# Altium PCB OpenVLC_1.3.1.PcbDoc
Units mm, origin at the board's own origin, x right, y up, seen from the top; angles counter-clockwise.
Board outline 40.12 x 54.61 mm, 2 copper layers (Top Layer, Bottom Layer); 43 components, 27 nets, 165 pads, 20 vias.
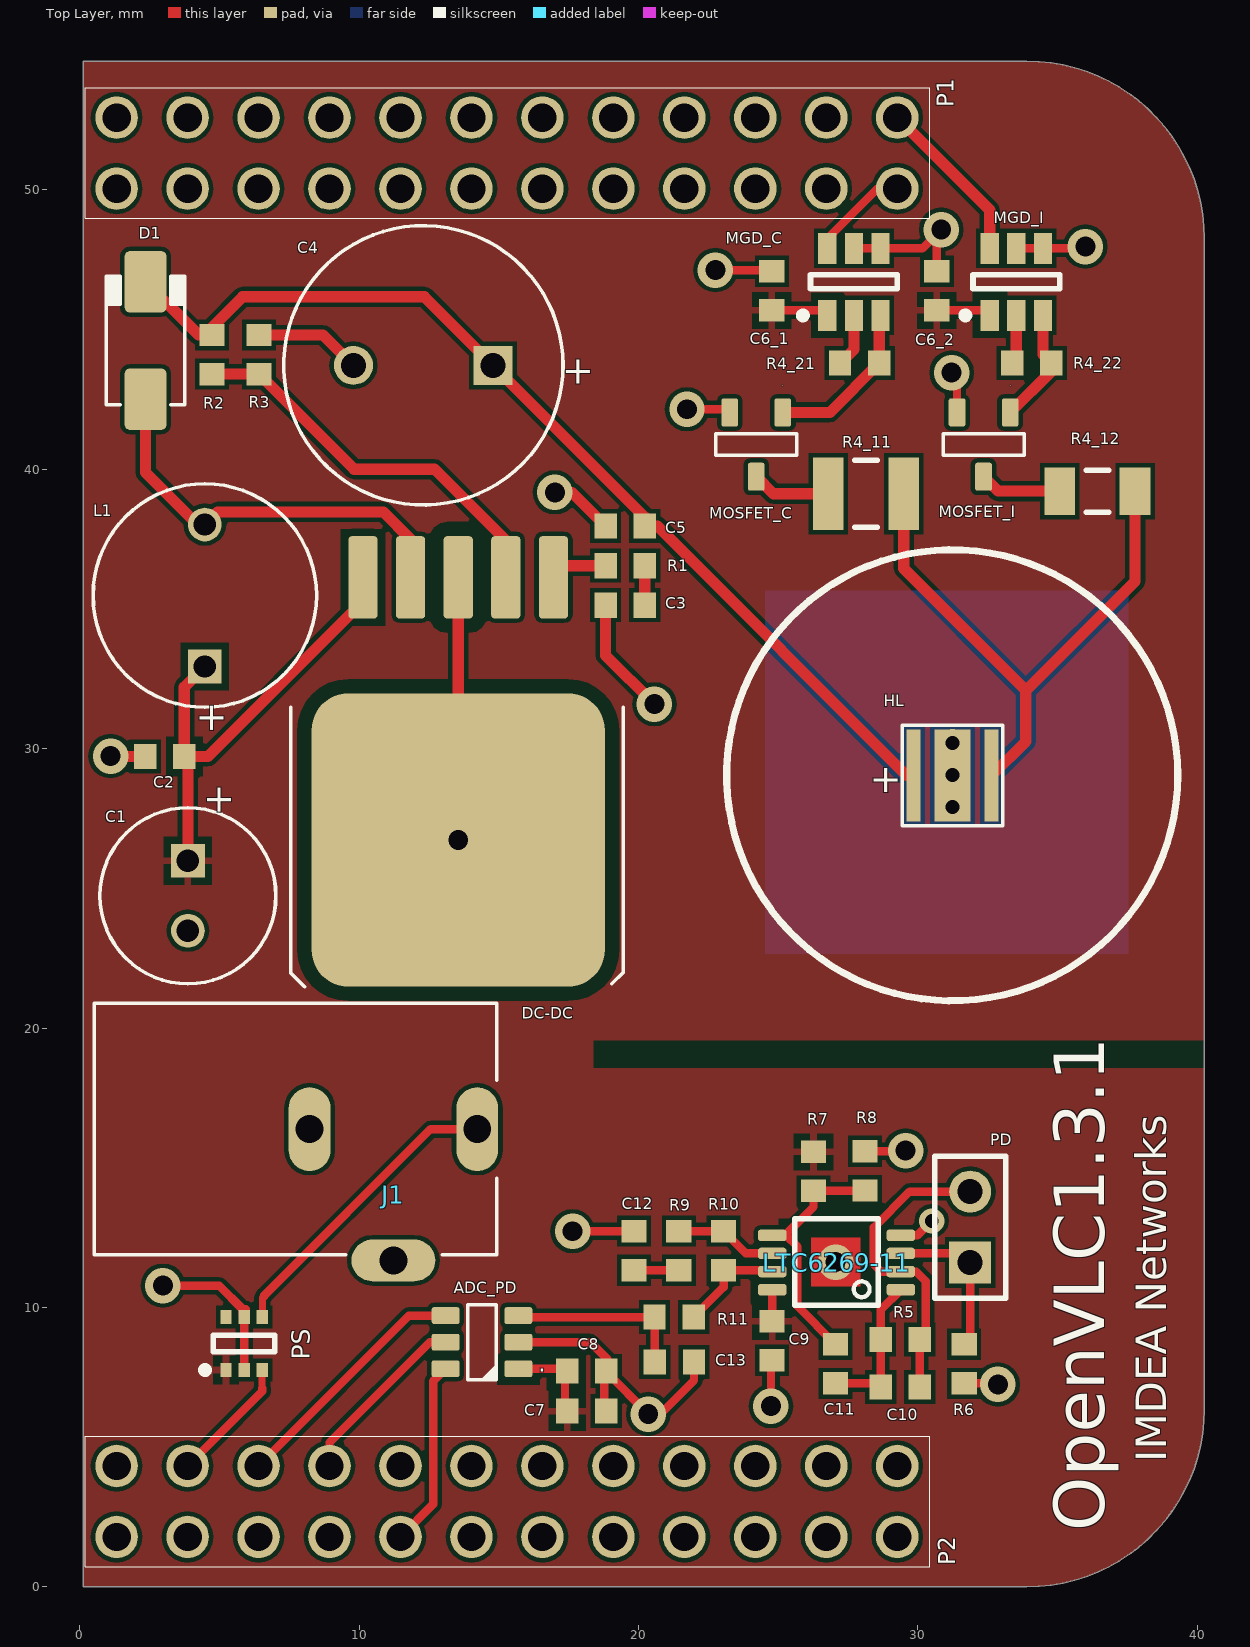
[diagram p0: Top Layer view]
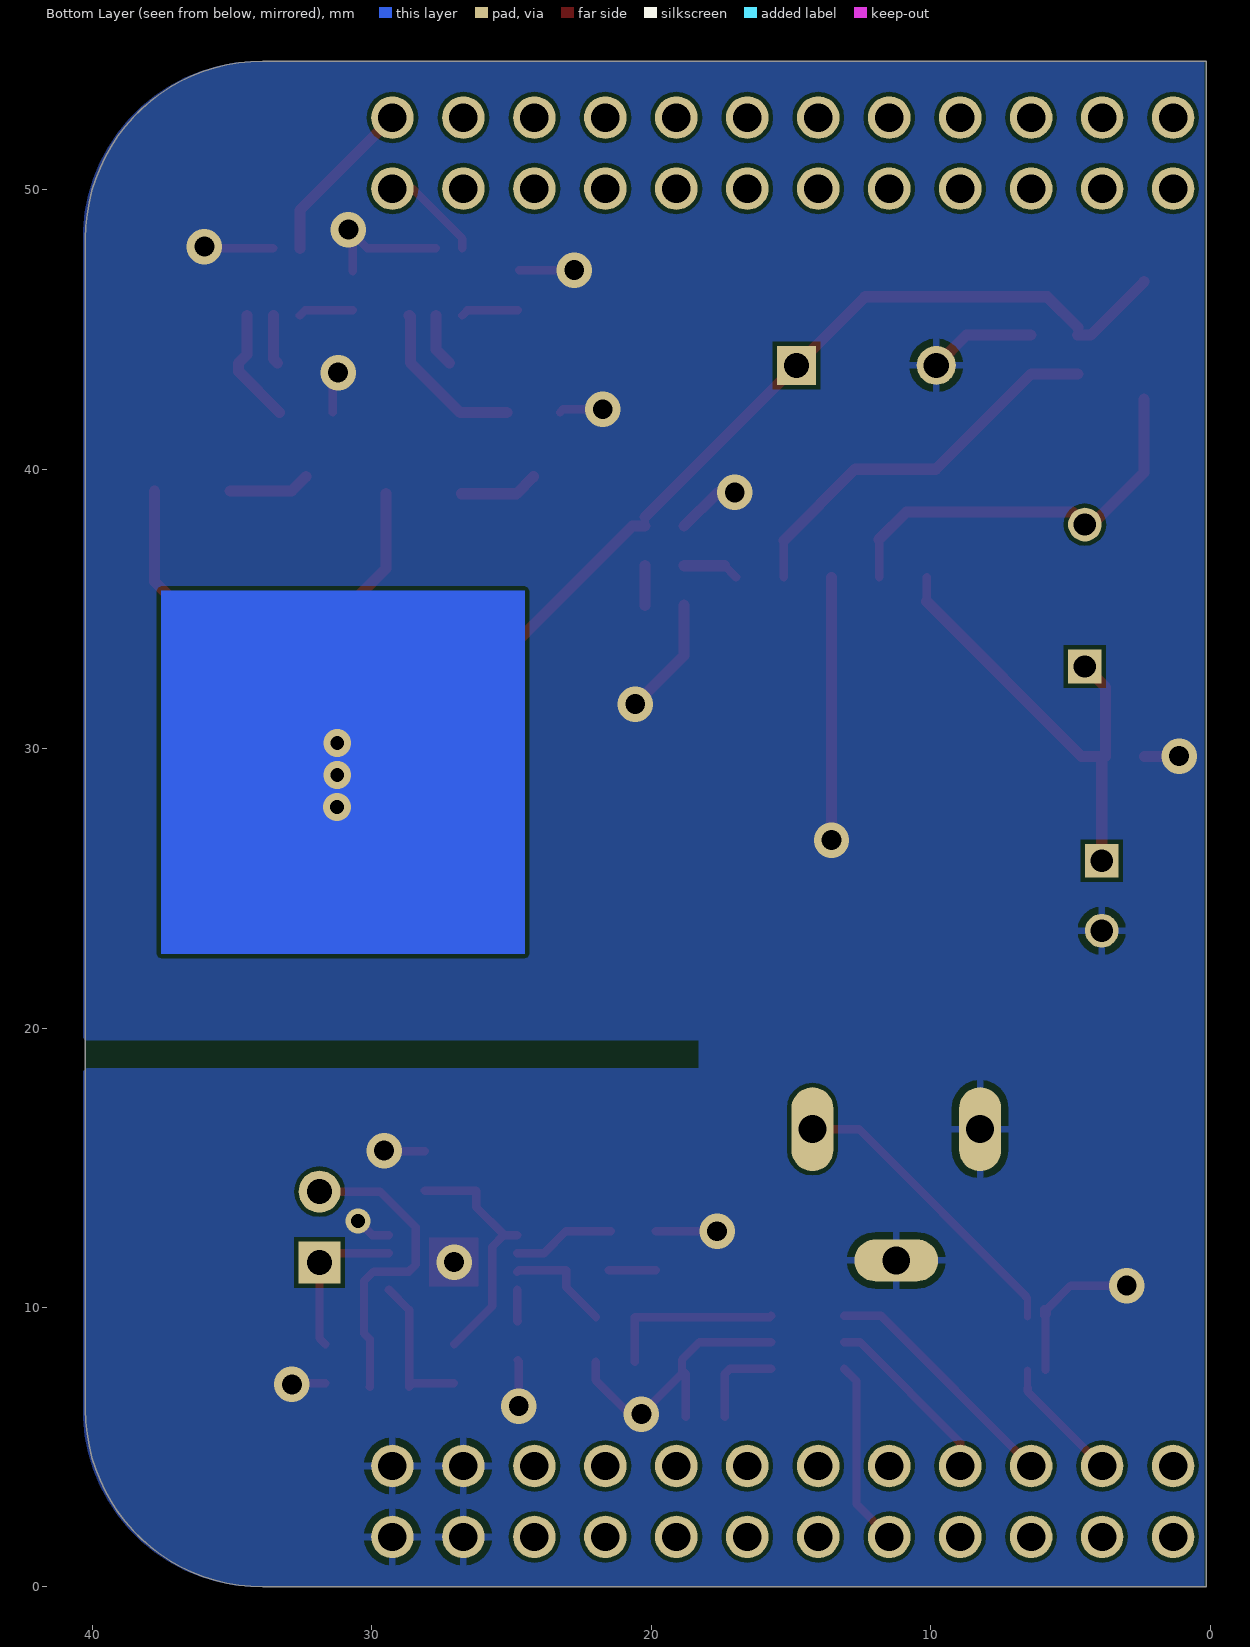
[diagram p1: Bottom Layer view, seen from below]

## Layer stack, top to bottom
Top Solder: solder mask 0.0102, Solder Resist, Dk 3.5
Top Layer: signal copper 0.0356
Dielectric1: dielectric 0.32, FR-4, Dk 4.8
Bottom Layer: signal copper 0.0356
Bottom Solder: solder mask 0.0102, Solder Resist, Dk 3.5

## Board outline
0.134,0 0.134,54.61 33.904,54.61 cw(c33.904,48.261) 40.254,48.26 40.254,6.35 cw(c33.904,6.35) 33.904,0

## Design rules (kind name [scope] priority, off if disabled: settings)
Clearance Clearance_1 [(InNet('GND') AND InComponent('DC-DC'))] p1: gap=0.5 ignorepadtopadclearanceinfootprint=FALSE except(0: Arc-Hole Track-Hole SMDPad-Hole THPad-Hole Via-Hole Fill-Hole Poly-Hole Region-Hole Text-Hole)
Clearance [All] p2: gap=0.15 ignorepadtopadclearanceinfootprint=FALSE except(0: Arc-Hole Track-Hole SMDPad-Hole THPad-Hole Via-Hole Fill-Hole Poly-Hole Region-Hole Text-Hole)
DiffPairsRouting [All] p1: maxlimit=0.3 minlimit=0.3 mostfreqgap=0.3 toplayer_minwidth=0.381 toplayer_maxwidth=0.381 toplayer_prefwidth=0.381 bottomlayer_minwidth=0.381 bottomlayer_maxwidth=0.381 bottomlayer_prefwidth=0.381 maxuncoupledlength=12.7
HoleSize [All] p1: absolutevalues=TRUE maxlimit=2.54 minlimit=0.25 maxpercent=80.000 minpercent=20.000
MinimumSolderMaskSliver [All] p1: minsoldermaskwidth=0.15
PolygonConnect PolygonConnect_1 [IsVia & InNet('GND')] p1: connectstyle=Direct reliefconductorwidth=0.254 reliefentries=4 polygonreliefangle="90 Angle" airgapwidth=0
PolygonConnect [All] p2: connectstyle=Relief reliefconductorwidth=0.254 reliefentries=4 polygonreliefangle="90 Angle" airgapwidth=0.254
RoutingVias [All] p1: holewidth=0.711 width=1.27 viastyle="Through Hole" minholewidth=25 minwidth=0.55 maxholewidth=0.711 maxwidth=1.27
SMDNeckDown [All] p1: percent=80.000
SilkToSilkClearance [All] p1: silktosilkclearance=0.15
SilkToSolderMaskClearance [IsPad] p1: minsilkscreentomaskgap=0.15 clearancetoexposedcopper=TRUE
SolderMaskExpansion [All] p1: expansion=0.102
Width [All] p1: maxlimit=0.5 minlimit=0.15 preferedwidth=0.3 minimp=50.000000 maximp=50.000000 favimp=50.000000
25 further rules are at their usual default settings.

## Classes and differential pairs
component class OpenVLC_1.3.7: ADC_PD C1 C2 C3 C4 C5 C7 C8 C10 C11 D1 DC-DC HL J1 L1 LTC6269-11 MOSFET_C P1 P2 PD R1 R2 R3 R5 R6 R7 R10 R11

## Components (designator, comment, footprint, x,y, rotation, side; value= is the part's Value field where it differs from the comment)
ADC_PD "ADC_PD" SOT23-6 14.401,8.76 r180 top
C1 "Cap" "WCAP-ATG8 6.3x11x2.5x0.5" 3.876,24.737 r270 top
C2 "Cap" 1608[0603] 3.048,29.724 r180 top
C3 "Cap" 1608[0603] 19.525,35.135 r180 top
C4 "Cap" "WCAP-ATG8 10x12.5x5x0.6" 12.3,43.721 r180 top
C5 "Cap" 1608[0603] 19.525,37.966 r180 top
C6_1 "Cap" 1608[0603] 24.772,46.387 r90 top
C6_2 "Cap" 1608[0603] 30.68,46.387 r90 top
C7 "Cap" 1608[0603] 18.152,6.294 r0 top
C8 "Cap" 1608[0603] 18.152,7.725 r0 top
C9 "Cap" 1608[0603] 24.786,8.809 r90 top
C10 "Cap" 1608[0603] 29.372,7.157 r180 top
C11 "Cap" 1608[0603] 27.06,7.983 r90 top
C12 "Cap" 1608[0603] 19.84,12.034 r270 top
C13 "Cap" 1608[0603] 21.288,8.056 r0 top
D1 "" DO-214AC 2.361,44.61 r90 top
DC-DC "LM2585" TO-263-5 13.55,29.982 r270 top
HL "High Power LED" LEDM345X345X226 31.239,29.04 r0 top
J1 "2.0 mm Center Pin, 2.5 A, Right Angle, Through Hole, Tapered Pins, Dc Power Jack Connector" CUI_PJ-102A 11.232,16.384 r90 top
L1 "Inductor" "WCAP-ATG8 8x16x5x0.5" 4.481,35.483 r90 top
LTC6269-11 "LTC6269-10" MSOP8 27.091,11.611 r180 top
MGD_C "LM5114B" SOT23-6_N 27.71,46.707 r90 top
MGD_I "LM5114B" SOT23-6_N 33.525,46.707 r90 top
MOSFET_C "MOSFET" SOT23-3 24.218,40.885 r270 top
MOSFET_I "MOSFET" SOT23-3 32.354,40.885 r270 top
P1 "BBB_P8_reduced" BBB_CAPE_NO_HEADER_R_24 -26.616,50.048 r180 top
P2 "BBB_P9_reduced" BBB_CAPE_NO_HEADER_R_24 -26.616,1.788 r180 top
PD "Photo Sen" HDR1X2 31.873,11.609 r90 top
PS "Comment" ONSC-SOT-363-6-419B-02_W_V 5.889,8.713 r90 top
R1 "Res Semi" 1608[0603] 19.525,36.551 r180 top
R2 "Res1" 1608[0603] 4.734,44.107 r90 top
R3 "Res1" 1608[0603] 6.415,44.107 r270 top
R4_11 "Res3" 14-1210 28.146,39.124 r180 top
R4_12 "Res3" C1206 36.427,39.219 r180 top
R4_21 "Res1" 1608[0603] 27.917,43.802 r180 top
R4_22 "Res1" 1608[0603] 34.077,43.802 r180 top
R5 "Res1" 1608[0603] 29.368,8.86 r180 top
R6 "Res1" 1608[0603] 31.66,7.983 r90 top
R7 "Res1" 1608[0603] 26.267,14.873 r90 top
R8 "Res1" 1608[0603] 28.106,14.889 r270 top
R9 "Res1" 1608[0603] 21.444,12.034 r270 top
R10 "Res1" 1608[0603] 23.049,12.034 r90 top
R11 "Res1" 1608[0603] 21.278,9.658 r0 top

## Footprints (in the part's own frame and the unit in brackets; to place one, negate y for a bottom-side part, rotate by r counter-clockwise, add the part's x,y. Pads: shape width x height; smd on the part's side, far side on the other; paste and mask are expansions set on the pad)
14-1210 [mm] "Chip Resistor, Body 3.2x2.5mm, IPC High Density"
  rect 1.1x2.6 smd: 1(-1.35,0) 2(1.35,0)
  silkscreen extent -0.4,-1.2 0.4,1.2, body extent -1.68,-1.32 1.68,1.32, height 0.9
1608[0603] [mm] "Chip Capacitor, Body 1.6x0.8mm, IPC High Density"
  rect 0.8x0.9 smd: 1(-0.7,0) 2(0.7,0)
  body extent -0.87,-0.48 0.87,0.48, height 1.3
BBB_CAPE_NO_HEADER_R_24 [mil] "46-pin male header for BeagleBone Black P8,P9"
  round 60 hole 40: 23(-1100,0) 24(-1100,-100) 25(-1200,0) 26(-1200,-100) 27(-1300,0) 28(-1300,-100) 29(-1400,0) 30(-1400,-100) 31(-1500,0) 32(-1500,-100) 33(-1600,0) 34(-1600,-100) 35(-1700,0) 36(-1700,-100) 37(-1800,0) 38(-1800,-100) 39(-1900,0) 40(-1900,-100) 41(-2000,0) 42(-2000,-100) 43(-2100,0) 44(-2100,-100) 45(-2200,0) 46(-2200,-100)
  silkscreen extent -2246,-142 -1056,42
C1206 [mm] "Chip Capacitor, Body 3.2x1.6mm, IPC High Density"
  rect 1.1x1.7 smd: 1(-1.35,0) 2(1.35,0)
  silkscreen extent -0.4,-0.75 0.4,0.75, body extent -1.7,-0.9 1.7,0.9, height 1.3
CUI_PJ-102A [mm]
  oval 3x1.5 hole 1: 1(0,-3) 2(0,3)
  oval 1.5x3 hole 1: 3(-4.7,0)
  silkscreen extent -4.5,-3.7 4.5,10.7
DO-214AC [mm] "JEDEC DO214 variation AC. SMA"
  round 0.508 on Mech15: 0(0,0)
  rrect25% 2.2x1.5 smd: A(-2.1,0) K(2.1,0)
  silkscreen extent -2.3,-1.4 2.3,1.4, body extent -2.6,-1.3 2.6,1.3, height 2.42
HDR1X2 [mm] "Connector; Header; 2 Position"
  rect 1.5x1.5 hole 0.9: 1(0,0)
  round 1.5 hole 0.9: 2(2.54,0)
  silkscreen extent -1.27,-1.27 3.81,1.27
LEDM345X345X226 [mm]
  rect 0.5x3.3 smd: 1(-1.4,0) 2(1.4,0)
  rect 1.3x3.3 smd: 3(0,0)
  silkscreen extent -1.8,-1.8 1.8,1.8
MSOP8 [mm]
  rrect50% 1.02x0.41 smd: 1(-2.3,0.975) 2(-2.3,0.325) 3(-2.3,-0.325) 4(-2.3,-0.975) 5(2.3,-0.975) 6(2.3,-0.325) 7(2.3,0.325) 8(2.3,0.975)
  silkscreen extent -1.5,-1.56 1.5,1.53, body extent -2.46,-1.49 2.44,1.51, height 1.15
ONSC-SOT-363-6-419B-02_W_V [mm] "SOT23, 6-Leads, Body 2x1.25mm, Pitch 0.65mm"
  rect 0.5x0.4 smd: 1(-0.95,0.65) 2(-0.95,0) 3(-0.95,-0.65) 4(0.95,-0.65) 5(0.95,0) 6(0.95,0.65)
  silkscreen extent -1.07,-1.1 0.3,1.52, body extent -0.63,-1 0.63,1, height 1.1
SOT23-3 [mm] "SOT23, 3 pin"
  round 0.5 on Mech15: 0(0,0)
  rrect25% 1x0.6 smd: 1(-1.15,0.95) 2(-1.15,-0.95) 3(1.15,0)
  silkscreen extent -0.38,-1.45 0.38,1.45, body extent -1.4,-1.45 1.4,1.45, height 1.29
SOT23-6 [mm]
  round 0.5 on Mech15: 0(0,0)
  rrect25% 1x0.6 smd: 1(-1.3,0.95) 2(-1.3,0) 3(-1.3,-0.95) 4(1.3,-0.95) 5(1.3,0) 6(1.3,0.95)
  silkscreen extent -0.51,-1.35 0.51,1.35, body extent -1.4,-1.45 1.4,1.45, height 1.44
SOT23-6_N [mm] "SOT23, 6-Leads, Body 2.9x1.6mm, Pitch 0.95mm, Lead Span 2.7mm, IPC Medium Density"
  rect 1.1x0.65 smd: 1(-1.2,0.95) 2(-1.2,0) 3(-1.2,-0.95) 4(1.2,-0.95) 5(1.2,0) 6(1.2,0.95)
  silkscreen extent -1.32,-1.55 0.25,1.95, body extent -0.9,-1.55 0.9,1.55, height 1.45
TO-263-5 [mm] "D-PAK/TO-263-5; 5 Leads; Body 14.4 (inc. leads) x 10.4 mm (LxW max)"
  round 0.5 on Mech15: 0(0,0)
  rrect25% 2.95x1.05 smd: 1(-6.15,3.41) 2(-6.15,1.705) 3(-6.15,0) 4(-6.15,-1.705) 5(-6.15,-3.41)
  rrect25% 10.5x10.5 smd: 3(3.25,0)
  silkscreen extent -1.5,-6 8.5,5.9, body extent -6.73,-5.08 7.29,5.08, height 4.56
"WCAP-ATG8 6.3x11x2.5x0.5" [mm] "Polarized capacitors, Aluminum Electrolytic Capacitors, 2-Leads, Body 6.3x11x2.5x0.5"
  rect 1.206x1.206 hole 0.8: 1(-1.25,0)
  round 1.206 hole 0.8: 2(1.25,0)
  silkscreen extent -3.15,-3.15 3.15,3.15, body extent -3.12,-3.13 3.14,3.15, height 11.11
"WCAP-ATG8 8x16x5x0.5" [mm] "Polarized capacitors, Aluminum Electrolytic Capacitors, 2-Leads, Body 8x16x3.5x0.5"
  rect 1.206x1.206 hole 0.8: 1(-2.54,0)
  round 1.206 hole 0.8: 2(2.54,0)
  silkscreen extent -4,-4 4,4, body extent -3.97,-3.98 3.99,4, height 19.51
"WCAP-ATG8 10x12.5x5x0.6" [mm] "Polarized capacitors, Aluminum Electrolytic Capacitors, 2-Leads, Body 10x12.5x5x0.6"
  rect 1.4x1.4 hole 0.9: 1(-2.5,0)
  round 1.4 hole 0.9: 2(2.5,0)
  silkscreen extent -5,-5 5,5, body extent -4.96,-4.97 4.99,5, height 19.71

## Part data
ADC_PD: library part ADS7883
C1 C2 C3 C4 C5 C6_1 C6_2 C7 C8 C9 C10 C11 C12 C13: "Capacitor"
D1: library part DIODE_SCHOTTKY_10MQ100NPBF, "Diode Schottky SMD 100V 2A SMA"
HL: library part LED1, "Typical RED GaAs LED"
J1: library part PJ-102A
MGD_C MGD_I: "MOSFET Gate Driver"
MOSFET_C MOSFET_I: library part MOSFET-P, "P-Channel MOSFET"
PD: "Photosensitive Diode"
R1: "Semiconductor Resistor"
R2 R3 R4_11 R4_12 R4_21 R4_22 R5 R6 R7 R8 R9 R10 R11: "Resistor"

## Via types
v1: diameter 1.27, hole 0.711, Top Layer to Bottom Layer, 16 vias
v2: diameter 1, hole 0.5, Top Layer to Bottom Layer, 3 vias
v3: diameter 0.9, hole 0.5, Top Layer to Bottom Layer, 1 vias

## Nets (pads, with @x,y where several pads share a name; then routed paths per layer and width w, separated by ;. In a path a pad name is that pad's centre, name@x,y a point inside that pad or via, vN(x,y) a via of type N, cw(c..) or ccw(c..) an arc to the next point about the centre after c; other vN are vias at no path point)
CS_PD: ADC_PD.6 P2.31 | length 6.7
  Top Layer w0.3: P2.31@11.484,1.788 12.657,2.96 12.657,7.365 ADC_PD.6
GND: ADC_PD.2 C1.2 C2.2 C3.2 C4.2 C5.2 C6_1.2 C6_2.2 C7.2 C8.2 C9.1 C12.1 C13.2 DC-DC.3 J1.2 J1.3 LTC6269-11.4 MGD_C.4 MGD_C.5 MGD_I.4 MGD_I.5 MOSFET_C.2 MOSFET_I.2 P2.43 P2.44 P2.45 P2.46 PS.2 PS.5 R3.1 R6.1 R8.1 | length 57.8
  Top Layer w0.3: v1@0.898,29.724 0.91,29.735 v1(1.106,29.735) ; v1(2.983,10.783) 4.993,10.783 5.839,9.937 5.839,9.763 5.889,9.713 PS.5@5.939,9.713 ; PS.2 PS.5 PS.5@5.939,9.713 ; 5.939,9.937 PS.5@5.939,9.713 ; ADC_PD.2 18.275,8.76 18.901,8.133 18.901,7.756 18.861,7.716 C8.2@18.852,7.707 ; v1(17.013,39.175) v1@17.616,39.175 ; v1(17.642,12.729) 19.836,12.729 C12.1@19.84,12.725 ; C7.2@18.772,6.094 18.772,7.627 C8.2@18.852,7.707 ; C8.2 C8.2@18.852,7.707 ; v1(21.738,42.149) 23.155,42.149 MOSFET_C.2 ; C13.2 21.988,7.391 20.784,6.187 v1(20.351,6.187) 18.852,7.686 C8.2@18.852,7.707 ; v1(22.758,47.13) C6_1.2@24.729,47.13 ; v1(24.745,6.469) 24.745,8.067 C9.1 ; MGD_C.5 MGD_C.4 30.163,47.907 v1@30.68,48.423 ; R8.1 29.533,15.589 v1(29.563,15.618) ; LTC6269-11.4 29.983,12.586 v3(30.499,13.102) ; C6_2.2 v1@30.68,48.423 ; v1(30.838,48.581) v1@30.68,48.423 ; v1(31.21,43.463) 31.404,43.269 MOSFET_I.2 ; R6.1 32.825,7.283 v1(32.864,7.245) ; MGD_I.5 MGD_I.4 35.929,47.907 v1(35.995,47.973)
  Top Layer w0.4: v1@0.898,29.724 C2.2 ; R3.1 8.715,44.807 C4.2 ; v1(13.55,26.732) DC-DC.3@13.55,36.132 ; v1@17.616,39.175 C5.2 ; C3.2 18.825,33.341 v1(20.572,31.594)
  other v1: 27.059,11.627
MISO_PD: ADC_PD.5 P2.30 | length 6.5
  Top Layer w0.3: P2.30@8.944,4.328 8.944,5.168 12.536,8.76 ADC_PD.5
MOSI_PD: ADC_PD.4 P2.28 | length 8.9
  Top Layer w0.3: P2.28@6.404,4.328 11.786,9.71 ADC_PD.4
NetADC_PD_3: ADC_PD.3 C13.1 R11.1 | length 6.5
  Top Layer w0.3: ADC_PD.3 15.753,9.658 R11.1 20.588,9.647 C13.1
NetC3_1: C3.1 R1.1 | length 1.4
  Top Layer w0.4: C3.1 R1.1
NetC4_1: C4.1 C5.1 D1.K HL.1 R2.2 | length 36.3
  Top Layer w0.3: R2.2 R2.2@4.734,45.081 ; C5.1 C5.1@20.225,38.296
  Top Layer w0.4: D1.K 4.264,44.807 R2.2 ; R2.2@4.734,45.081 5.828,46.175 12.347,46.175 C4.1 C5.1@20.225,38.296 ; C5.1 20.676,37.966 29.601,29.04 HL.1
NetC10_1: C10.1 LTC6269-11.2 PD.2 R5.1 | length 11.3
  Top Layer w0.3: C10.1 30.068,7.161 R5.1 30.28,9.072 30.28,10.941 29.936,11.286 LTC6269-11.2 28.681,11.286 28.428,11.538 28.428,12.871 29.706,14.149 PD.2
NetC10_2: C10.2 C11.1 LTC6269-11.1 R5.2 | length 5.4
  Top Layer w0.3: C11.1 28.546,7.283 C10.2@28.668,7.161 ; C10.2 C10.2@28.668,7.161 ; LTC6269-11.1 28.668,9.913 R5.2 C10.2@28.668,7.161
NetC11_2: C11.2 LTC6269-11.5 R7.1 R8.2 | length 9.4
  Top Layer w0.3: C11.2 25.689,10.054 25.689,12.181 25.285,12.586 LTC6269-11.5 25.251,12.586 26.267,13.602 R7.1 28.09,14.173 R8.2
NetC12_2: C12.2 R9.2 | length 1.7
  Top Layer w0.3: C12.2 R9.2 21.499,11.334 21.508,11.325 R9.2@21.518,11.334
NetD1_A: D1.A DC-DC.4 L1.2 | length 14.8
  Top Layer w0.3: DC-DC.4 DC-DC.4@11.845,37.497
  Top Layer w0.4: D1.A 2.36,39.886 4.224,38.023 L1.2 4.932,38.474 10.868,38.474 DC-DC.4@11.845,37.497
NetDC-DC_1: DC-DC.1 R1.2 | length 2
  Top Layer w0.3: DC-DC.1 DC-DC.1@17.378,36.551
  Top Layer w0.4: DC-DC.1@17.378,36.551 R1.2
NetDC-DC_2: DC-DC.2 R2.1 R3.2 | length 14.3
  Top Layer w0.3: DC-DC.2 DC-DC.2@15.255,37.453
  Top Layer w0.4: R2.1 R3.2 9.818,40.004 12.704,40.004 DC-DC.2@15.255,37.453
NetHL_2: HL.2 R4_11.1 R4_12.1 | length 21.2
  Top Layer w0.4: R4_11.1 29.496,36.452 33.868,32.08 ; HL.2 33.865,30.266 33.865,32.078 37.777,35.989 R4_12.1
NetLTC6269-11_3: LTC6269-11.3 PD.1 R6.2 | length 5.6
  Top Layer w0.3: LTC6269-11.3 31.546,11.936 PD.1 31.873,8.896 R6.2
NetLTC6269-11_6: LTC6269-11.6 R9.1 R10.2 | length 3.7
  Top Layer w0.3: R9.1 R10.2 23.848,11.936 LTC6269-11.6
NetLTC6269-11_7: LTC6269-11.7 R10.1 R11.2 | length 3.9
  Top Layer w0.3: R11.2 23.049,10.729 R10.1 24.742,11.334 LTC6269-11.7
NetMGD_C_2: MGD_C.2 R4_21.2 | length 1.9
  Top Layer w0.4: R4_21.2 27.71,44.296 MGD_C.2
NetMGD_C_3: MGD_C.3 MOSFET_C.1 R4_21.1 | length 5.9
  Top Layer w0.4: MOSFET_C.1 26.849,42.035 R4_21.1 28.617,45.464 MGD_C.3
NetMGD_I_2: MGD_I.2 R4_22.2 | length 1.8
  Top Layer w0.4: R4_22.2 33.525,43.95 MGD_I.2
NetMGD_I_3: MGD_I.3 MOSFET_I.1 R4_22.1 | length 4.2
  Top Layer w0.4: MOSFET_I.1 34.777,43.509 R4_22.1 34.475,44.105 MGD_I.3
NetMOSFET_C_3: MOSFET_C.3 R4_11.2 | length 2.8
  Top Layer w0.4: MOSFET_C.3 24.83,39.124 R4_11.2
NetMOSFET_I_3: MOSFET_I.3 R4_12.2 | length 2.9
  Top Layer w0.4: MOSFET_I.3 32.87,39.219 R4_12.2
P8_45: MGD_C.6 P1.45 | length 3.6
  Top Layer w0.3: MGD_C.6 26.76,48.256 28.552,50.048 P1.45
P8_46: MGD_I.6 P1.46 | length 6.1
  Top Layer w0.4: P1.46 32.575,49.277 MGD_I.6
VCC: ADC_PD.1 C1.1 C2.1 C6_1.1 C6_2.1 C7.1 C8.1 C9.2 DC-DC.5 L1.1 LTC6269-11.8 MGD_C.1 MGD_I.1 PS.1 R7.2 | length 25.3
  Top Layer w0.3: C2.1 C2.1@3.876,29.596 ; DC-DC.5@10.14,35.27 DC-DC.5 ; ADC_PD.1 17.189,7.81 17.372,7.627 C7.1@17.372,6.094 ; C6_1.1 26.58,45.687 MGD_C.1 ; C9.2 24.791,9.513 LTC6269-11.8 ; C6_2.1 32.395,45.687 MGD_I.1
  Top Layer w0.4: C1.1 C2.1@3.876,29.596 ; L1.1 3.748,32.209 C2.1 4.594,29.724 DC-DC.5@10.14,35.27
pads on no net: ADC_PD.0 D1.0 DC-DC.0 HL.3 J1.1 MOSFET_C.0 MOSFET_I.0 P1.23 P1.24 P1.25 P1.26 P1.27 P1.28 P1.29 P1.30 P1.31 P1.32 P1.33 P1.34 P1.35 P1.36 P1.37 P1.38 P1.39 P1.40 P1.41 P1.42 P1.43 P1.44 P2.23 P2.24 P2.25 P2.26 P2.27 P2.29 P2.32 P2.33 P2.34 P2.35 P2.36 P2.37 P2.38 P2.39 P2.40 P2.41 P2.42 PS.3 PS.4 PS.6
copper on no net: | length 15.4
  Top Layer w0.254: 6.532,6.996 6.532,7.755 ; 6.539,9.663 6.539,10.359
  Top Layer w0.3: 3.864,4.328 4.721,5.185 6.532,6.996 6.532,7.106 ; 6.613,10.407 6.613,10.433 6.62,10.44 12.564,16.384 13.032,16.384 14.232,16.384
  other v2: 31.244,27.91 31.239,29.064 31.239,30.209

## Polygon pours and split planes (outlines as drawn)
GND on Bottom Layer "Ground plane" (solid, pour order 8): 0.209,54.607 0.209,0 0.214,0 33.986,0 ccw(c33.986,6.35) 40.336,6.35 40.336,6.504 40.336,48.261 ccw(c33.986,48.261) 33.986,54.611 33.92,54.611
VCC on Top Layer "Power plane" (solid, pour order 6): 0.124,54.607 0.124,0 0.129,0 33.901,0 ccw(c33.901,6.35) 40.251,6.35 40.251,6.504 40.251,48.261 ccw(c33.901,48.261) 33.901,54.611 33.835,54.611

## Other copper
Top Layer:
  pour cut-out: 31.968,46.38 33.202,46.38 33.202,44.707 31.968,44.707
  pour cut-out: 26.181,46.311 27.336,46.311 27.336,44.703 26.181,44.703
  pour cut-out: 9.351,37.846 10.933,37.846 10.933,34.396 9.351,34.396
  pour cut-out: 3.624,33.799 5.338,33.799 5.338,32.085 3.624,32.085
  pour cut-out: 4.402,29.02 3.094,29.02 3.094,30.428 4.402,30.428
  pour cut-out: 40.254,19.571 18.388,19.571 18.388,18.555 40.254,18.555
  pour cut-out: 14.951,8.291 16.471,8.291 16.473,7.241 14.951,7.241
  pour cut-out: 24.02,11.067 25.634,11.067 25.636,10.169 24.02,10.169
  pour cut-out: 16.715,8.343 18.017,8.342 18.019,7.037 16.715,7.037
  pour cut-out: 25.021,13.174 29.14,13.174 29.146,9.907 25.021,9.907
  region net GND: 26.191,12.505 27.939,12.505 27.939,10.757 26.191,10.757
Bottom Layer:
  region: 24.533,22.654 37.533,22.654 37.533,35.654 24.533,35.654
  pour cut-out: 40.13,19.571 18.298,19.571 18.298,18.555 40.13,18.555
  pour cut-out: 40.255,19.571 18.422,19.571 18.422,18.555 40.255,18.555

## Silkscreen, mask and mechanical layers (free items; w line width, h text height)
Top Overlay:
  circle w0.254: c31.23,29.049 r8.073
  text "IMDEA Networks" at 38.888,4.455 h1.1 r90
  text "OpenVLC1.3.1" at 36.679,2 h1.8 r90
Mechanical 1:
  lines w0.254: 0.158,54.587 0.158,0 33.904,0 ccw(c33.904,6.35) 40.254,6.35 ; 0.158,54.61 33.904,54.61 cw(c33.904,48.26) 40.254,48.26 ; 40.253,6.386 40.253,48.296

## Text inside footprints (layer, text, board x,y; h text height)
C1: Top Overlay "+" at 4.572,28.751 h1 r270
C4: Top Overlay "+" at 18.418,43.929 h1 r180
HL: Top Overlay "+" at 28.274,28.447 h1
L1: Top Overlay "+" at 5.157,30.514 h1 r90